# Altium PCB box35x30.PcbDoc
Units mm, origin at the board's own origin, x right, y up, seen from the top; angles counter-clockwise.
Board outline 34.08 x 19.9 mm, 2 copper layers (Top Layer, Bottom Layer); 26 components, 22 nets, 105 pads, 7 vias.
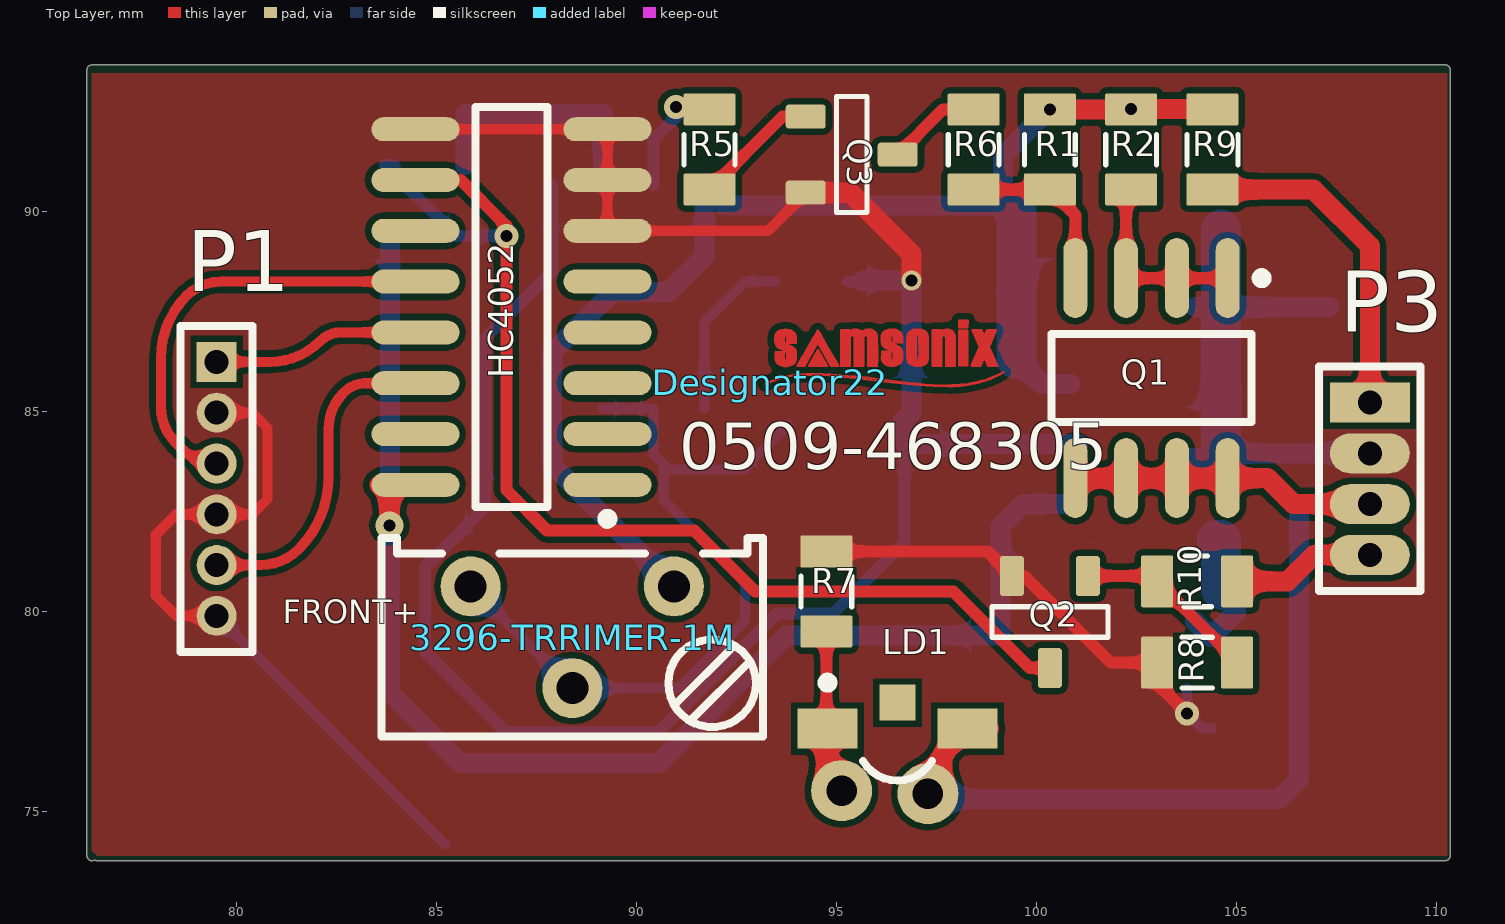
[diagram p0: Top Layer view]
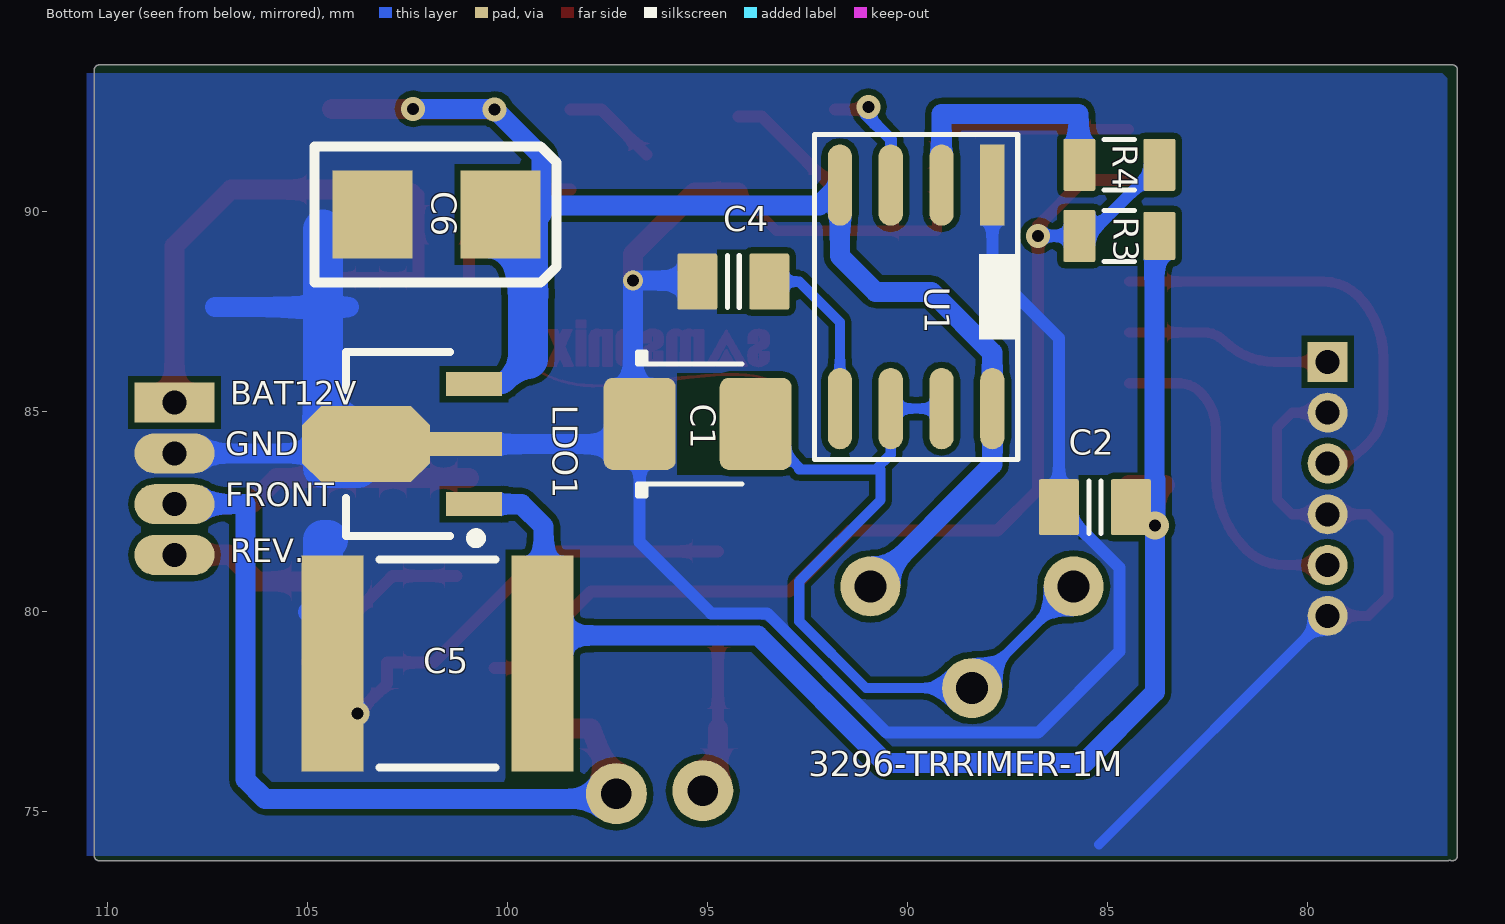
[diagram p1: Bottom Layer view, seen from below]
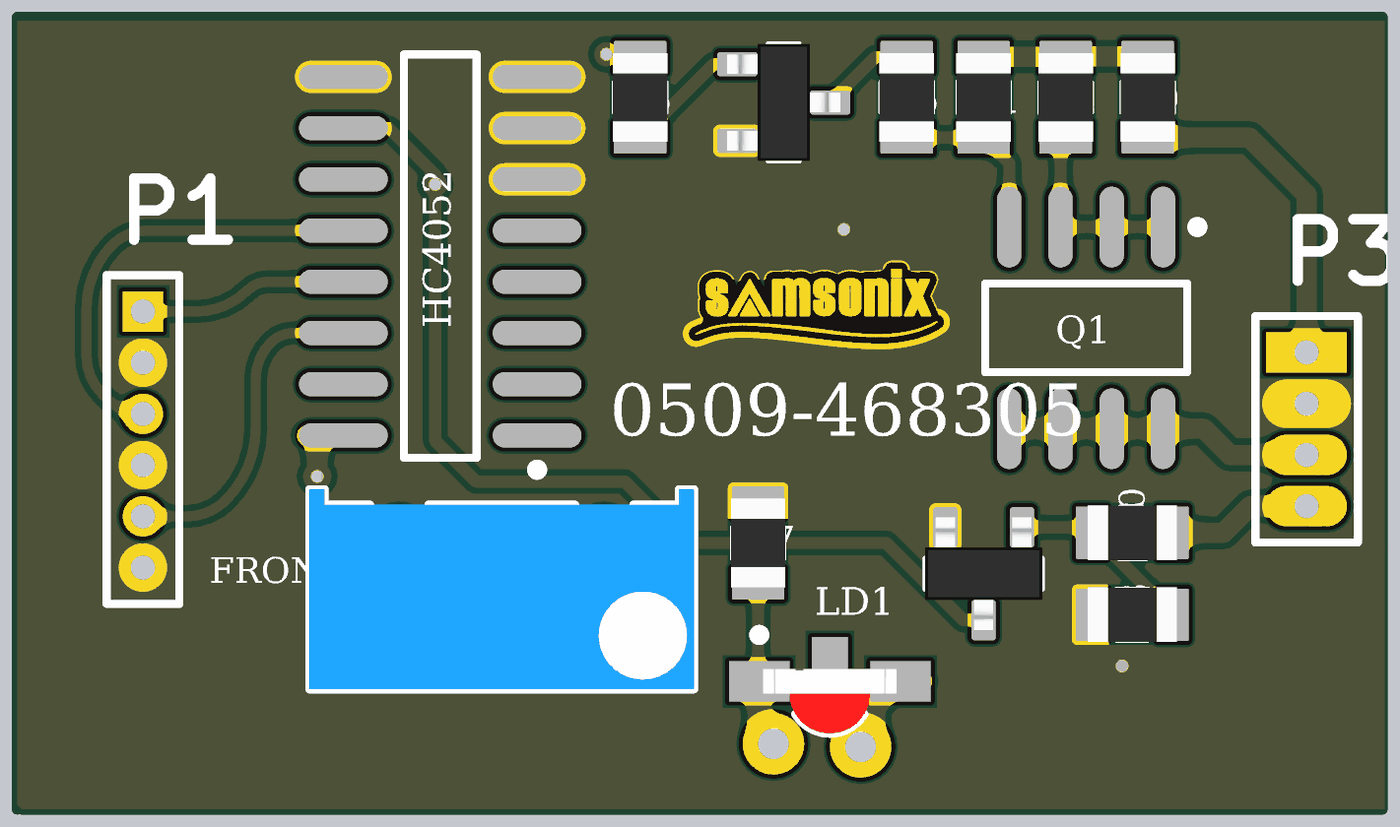
[diagram p2: 3D render of the assembled board from above, using the file's embedded part models]
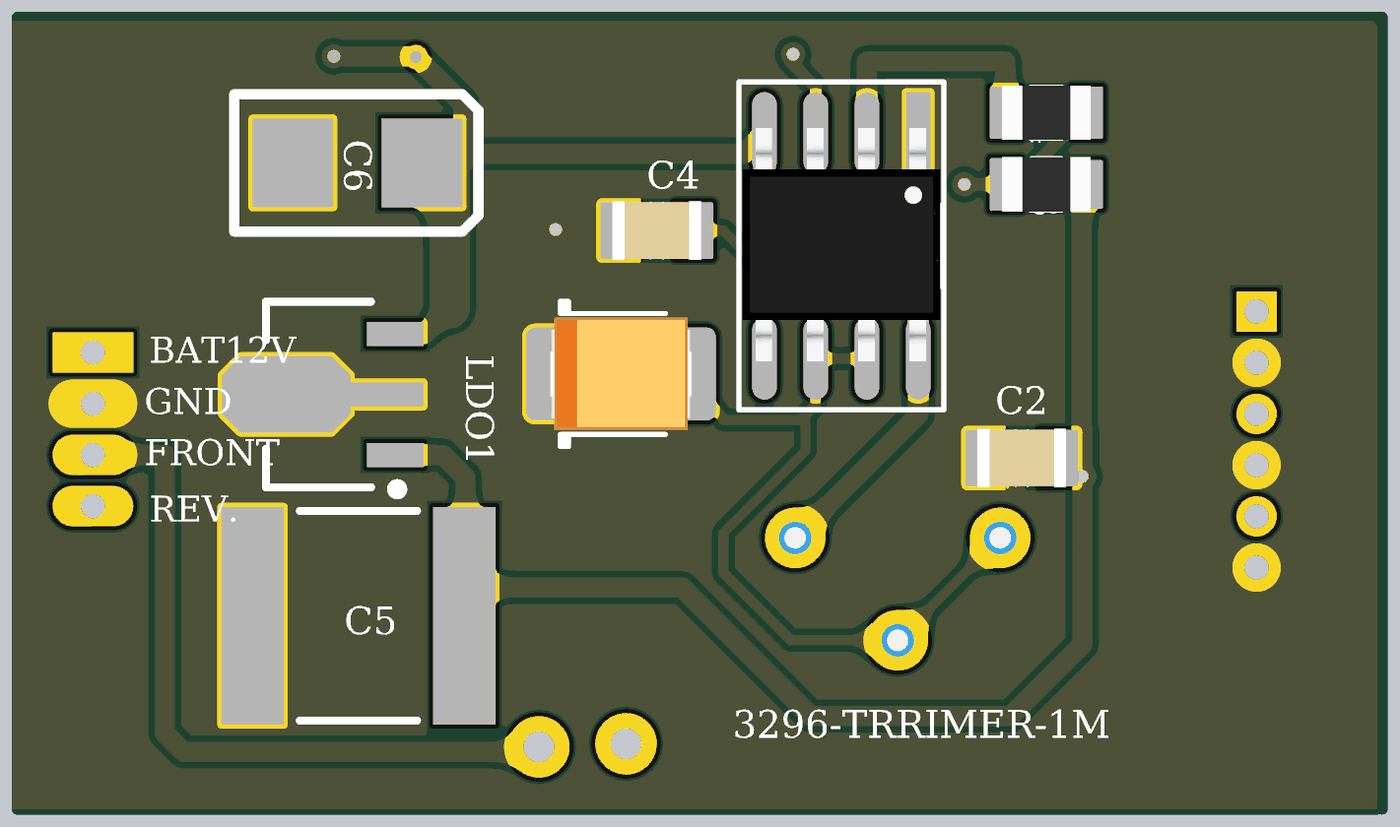
[diagram p3: 3D render of the assembled board from below, using the file's embedded part models]

## Layer stack, top to bottom
Top Solder: solder mask 0.0102, Solder Resist, Dk 3.5
Top Layer: signal copper 0.0356
Dielectric 1: dielectric 0.32, FR-4, Dk 4.8
Bottom Layer: signal copper 0.0356
Bottom Solder: solder mask 0.0102, Solder Resist, Dk 3.5

## Board outline
76.256,73.889 76.256,93.531 cw(c76.383,93.531) 76.383,93.658 110.211,93.658 cw(c110.211,93.531) 110.338,93.531 110.338,73.889 cw(c110.211,73.889) 110.211,73.761 76.51,73.761 cw(c76.51,73.889) 76.446,73.778 cw(c76.383,73.889)

## Design rules (kind name [scope] priority, off if disabled: settings)
Clearance [All] p1: gap=0.152
HoleSize [All] p1: absolutevalues=TRUE maxlimit=6.3 minlimit=0.125 maxpercent=80.000 minpercent=20.000
MinimumAnnularRing [All] p1: minimumring=0.1
PolygonConnect [All] p1: connectstyle=Direct reliefconductorwidth=0.254 reliefentries=4 polygonreliefangle="90 Angle" airgapwidth=0.254
RoutingVias [All] p1: holewidth=0.5 width=0.5 viastyle="Through Hole" minholewidth=0.3 minwidth=0.5 maxholewidth=0.4 maxwidth=1
SMDNeckDown [All] p1: percent=95.000
SilkToSilkClearance [All] p1 off: silktosilkclearance=0.01
SilkToSolderMaskClearance [IsPad] p1: minsilkscreentomaskgap=0.178 clearancetoexposedcopper=TRUE
SolderMaskExpansion [All] p1: expansion=0.1
Width Width_Logo [InUnion(1)] p1: maxlimit=1 minlimit=0.001 preferedwidth=0.254
Width Width_Power [InNetClass('Power')] p2: maxlimit=2 minlimit=0.3 preferedwidth=0.5
Width [All] p3: maxlimit=2 minlimit=0.254 preferedwidth=0.254
27 further rules are at their usual default settings.

## Components (designator, comment, footprint, x,y, rotation, side; value= is the part's Value field where it differs from the comment)
3296-TRRIMER-1M "1M" TRIM_BOURNS_3296Y 88.392,79.35 r180 top
C1 "Cap_Tan_1210" CAP_TAN_B1210 95.25,84.684 r180 bottom
C2 "Cap_0805" CAP_0805 85.319,82.601 r180 bottom
C4 "Cap_0805" CAP_0805 94.361,88.24 r180 bottom
C5 "CAP 47uF 25V 2220(5750)" CAPC2220(5750)230_N 101.752,78.689 r180 bottom
C6 "TAJB106K020R" AVX-CAPC3528_V 101.778,89.916 r0 bottom
Designator22 "Comment" "SAMSONIX 6x2_TL" 93.345,85.725 r0 top
HC4052 "MC74HC4052AD" 751B-05_N 86.868,87.605 r180 top
LD1 "Red" LED_AVAGO_HSMC-C110 96.52,77.064 r0 top
LDO1 "L78L05ABUTR" SOT-89_N 102.743,84.176 r0 bottom
P1 "VIDEO" MHDR1X6 79.502,86.233 r270 top
P3 "MHDR1X4" MHDR1X4 108.331,85.217 r270 top
Q1 "SI4435DY" SO-8_N 102.87,85.827 r270 top
Q2 "MBT2222" SOT23-3 100.33,79.731 r270 top
Q3 "MBT2222" SOT23-3 95.377,91.415 r0 top
R1 "Res_0805" RES_0805#1 100.33,91.542 r90 top
R2 "Res_0805" RES_0805#1 102.362,91.542 r90 top
R3 "Res_0805" RES_0805#2 84.709,89.383 r0 bottom
R4 "Res_0805" RES_0805#1 84.709,91.161 r0 bottom
R5 "Res_0805" RES_0805#1 91.821,91.542 r90 top
R6 "Res_0805" RES_0805#1 98.425,91.542 r270 top
R7 "Res_0805" RES_0805#1 94.742,80.493 r270 top
R8 "Res_0805" RES_0805#1 104.013,78.715 r180 top
R9 "Res_0805" RES_0805#1 104.394,91.542 r270 top
R10 "Res_0805" RES_0805#1 104.013,80.747 r180 top
U1 "NE555" SO8 87.884,90.653 r270 bottom

## Footprints (in the part's own frame and the unit in brackets; to place one, negate y for a bottom-side part, rotate by r counter-clockwise, add the part's x,y. Pads: shape width x height; smd on the part's side, far side on the other; paste and mask are expansions set on the pad)
751B-05_N [mm] "SOIC, 16-Leads, Body 9.9x3.9mm, Pitch 1.27mm, IPC Medium Density"
  oval 2.2x0.6 smd: 1(-2.4,4.445) 2(-2.4,3.175) 3(-2.4,1.905) 4(-2.4,0.635) 5(-2.4,-0.635) 6(-2.4,-1.905) 7(-2.4,-3.175) 8(-2.4,-4.445) 9(2.4,-4.445) 10(2.4,-3.175) 11(2.4,-1.905) 12(2.4,-0.635) 13(2.4,0.635) 14(2.4,1.905) 15(2.4,3.175) 16(2.4,4.445)
  silkscreen extent -2.53,-5 0.9,5.42, body extent -2,-5 2,5, height 1.75
AVX-CAPC3528_V [mm] "SMT Capacitor, 2 Leads, Body 3.5x2.8mm"
  rect 2x2.2 smd: 1(-1.6,0) 2(1.6,0)
  silkscreen extent -3,-1.7 3.05,1.7, body extent -1.79,-1.54 1.8,1.54, height 1.9
CAP_0805 [mm] "Chip Capacitor, Body 2.0x1.2mm, 0805, IPC Medium Density"
  round 0.254 on Mech14: 0(0,0)
  rrect10% 1x1.4 smd: 1(-0.9,0) 2(0.9,0)
  Top Layer pour cut-out: -0.4,0.8 0.4,0.8 0.4,-0.8 -0.4,-0.8
  silkscreen extent -0.15,-0.65 0.15,0.65, body extent -1.1,-0.72 1.1,0.73, height 1.34
CAP_TAN_B1210 [mm] "Molded body capacitor, Body 3.5x2.8mm, 1210, IPC Nominal settings"
  round 0.254 on Mech14: 0(0,0)
  rrect25% 1.8x2.3 smd: 1(-1.45,0) 2(1.45,0)
  Top Layer pour cut-out: -0.508,1.27 0.508,1.27 0.508,-1.27 -0.508,-1.27
  silkscreen extent -1.5,-1.8 1.1,1.8, body extent -1.75,-1.4 1.75,1.4, height 2.1
CAPC2220(5750)230_N [mm] "Chip Capacitor, Body 5.7x5.0mm, Height 2.3mm, IPC Medium Density"
  rect 1.55x5.4 smd: 1(-2.625,0) 2(2.625,0)
  silkscreen extent -1.45,-2.6 1.45,2.6, body extent -3.05,-2.7 3.05,2.7, height 2.3
LED_AVAGO_HSMC-C110 [mm] "Red Chip LED, 2-Leads, Body 3.3x1.6mm, Side Emitting Package"
  rect 1.5x1 smd: 1(-1.75,0) 2(1.75,0)
  rect 0.9x0.9 smd: 3(0,0.65)
  silkscreen extent -1.87,-1.3 0.86,1.27, body extent -1.65,-1.3 1.65,0.3, height 1
MHDR1X4 [mm] "Connector; Header; 4 Position"
  rect 1x2 hole 0.6: 1(0,0)
  oval 1x2 hole 0.6: 2(1.27,0) 3(2.54,0) 4(3.81,0)
  silkscreen extent -0.9,-1.27 4.71,1.27
MHDR1X6 [mm] "Connector; Header; 6 Position"
  rect 1x1 hole 0.6: 1(0,0)
  round 1 hole 0.6: 2(1.27,0) 3(2.54,0) 4(3.81,0) 5(5.08,0) 6(6.35,0)
  silkscreen extent -0.9,-0.9 7.25,0.9
RES_0805#1 [mm] "Chip Resistor, Body 2.0x1.2mm, 0805, IPC Medium Density"
  round 0.254 on Mech14: 0(0,0)
  rrect10% 0.8x1.3 smd: 1(-1,0) 2(1,0)
  Top Layer pour cut-out: -0.6,0.75 0.6,0.75 0.6,-0.75 -0.6,-0.75
  silkscreen extent -0.38,-0.64 0.38,0.64, body extent -1.1,-0.67 1.1,0.68, height 0.69
RES_0805#2 [mm] "Chip Resistor, Body 2.0x1.2mm, 0805, IPC Medium Density"
  round 0.254 on Mech14: 0(0,0)
  rrect10% 0.8x1.2 smd: 1(-1,0)
  rrect10% 0.8x1.3 smd: 2(1,0)
  Top Layer pour cut-out: -0.6,0.75 0.6,0.75 0.6,-0.75 -0.6,-0.75
  silkscreen extent -0.38,-0.64 0.38,0.64, body extent -1.1,-0.67 1.1,0.68, height 0.69
"SAMSONIX 6x2_TL" [mm]
  Top Layer drawing of 841 lines, arcs and shapes, not listed
SO8 [mil]
  rect 80x24 smd: 1(0,0)
  oval 80x24 smd: 2(0,-50) 3(0,-100) 4(0,-150) 5(220,-150) 6(220,-100) 7(220,-50) 8(220,0)
  silkscreen extent -50,-175 270,25, body extent -5,-172 222,22, height 57
SO-8_N [mm] "SOIC, 8-Leads, Body 4.9x3.9mm, Pitch 1.27mm, IPC Medium Density"
  oval 2x0.6 smd: 1(-2.5,1.905) 2(-2.5,0.635) 3(-2.5,-0.635) 4(-2.5,-1.905) 5(2.5,-1.905) 6(2.5,-0.635) 7(2.5,0.635) 8(2.5,1.905)
  silkscreen extent -2.62,-2.5 1.1,2.88, body extent -2,-2.5 2,2.5, height 1.75
SOT23-3 [mm] "SOT23, 3 pin"
  round 0.5 on Mech15: 0(0,0)
  rrect25% 1x0.6 smd: 1(-1.15,0.95) 2(-1.15,-0.95) 3(1.15,0)
  silkscreen extent -0.38,-1.45 0.38,1.45, body extent -1.4,-1.45 1.4,1.45, height 1.29
SOT-89_N [mm] "SOT89, 3-Leads, Body 4.5x2.4 mm, Pitch 1.5mm, Lead Span 4.1mm, IPC Medium Density"
  rect 1.4x0.6 smd: 1(-1.9,1.5) 3(-1.9,-1.5)
  rect 1.8x0.6 smd: 2(-1.7,0)
  oct 3.2x1.9 smd: 2(0.8,0)
  silkscreen extent -2.07,-2.3 1.3,2.47, body extent -1.3,-2.3 1.3,2.3, height 1.6
TRIM_BOURNS_3296Y [mm] "Trimming Potentiometer BOURNS 3296Y Series"
  round 1.5 hole 0.8: 1(-2.54,-1.27) 2(0,1.27) 3(2.54,-1.27)
  silkscreen extent -4.76,-2.48 4.76,2.48, body extent -4.76,-2.47 4.77,2.49, height 11.49

## Part data
3296-TRRIMER-1M: library part TRIM_25T_1M_BOURNS_3296Y-1-105LF, "Trimming Potentiometer"
C1 C2 C4: "Capacitor"
C5: library part CMP-1042-00785-1, "CAP 47uF 25V -20% to +80% 2220 (5750 Metric) Thickness 2.2mm SMD"
C6: library part CMP-0279-00001-1, "Capacitor, Tantalum, 10uF 10% 20V MCCT-B (3528)"
HC4052: "Analog Multiplexer/Demultiplexer"
LD1: library part LED_AVAGO_HSMC-C110, "LED Red 1C 2A"
LDO1: "Positive Voltage Regulator, 5V, 4-Pin SOT-89, Tape and Reel"
P1: library part MHDR1X6, "Header, 6-Pin"
P3: "Header, 4-Pin"
Q1: "P-Channel 30V (D-S) Rated  MOSFET"
Q2 Q3: library part NPN_MMBT2222A, "Transistor SMD NPN 40V 600mA 250mW SOT23-3"
R1 R2 R3 R4 R5 R6 R7 R8 R9 R10: "Resistor"
U1: "TIMER IC"

## Free pads (board coordinates)
  round 1.524 hole 0.762: 2(95.123,75.514) 3(97.282,75.438)

## Via types
v1: diameter 0.6, hole 0.3, Top Layer to Bottom Layer, tented both sides, 4 vias
v2: diameter 0.6, hole 0.3, Top Layer to Bottom Layer, 1 vias
v3: diameter 0.7, hole 0.3, Top Layer to Bottom Layer, tented both sides, 1 vias
v4: diameter 0.5, hole 0.3, Top Layer to Bottom Layer, tented both sides, 1 vias

## Nets (pads, with @x,y where several pads share a name; then routed paths per layer and width w, separated by ;. In a path a pad name is that pad's centre, name@x,y a point inside that pad or via, vN(x,y) a via of type N, cw(c..) or ccw(c..) an arc to the next point about the centre after c; other vN are vias at no path point)
12V: 3296-TRRIMER-1M.1 C6.1 LDO1.3 R1.2 R2.2 R9.1 U1.4 U1.8 | length 35.7
  Top Layer w0.5: v2(100.33,92.542) R2.2 ; v1(102.362,92.558) R9.1@104.394,92.558
  Bottom Layer w0.5: 3296-TRRIMER-1M.1 87.884,83.668 U1.8 87.884,86.462 89.408,87.986 90.805,87.986 91.694,88.875 U1.4 92.202,90.145 98.984,90.145 ; 99.153,89.916 99.153,91.38 100.33,92.558 v1(102.362,92.558) ; 99.49,86.311 100.125,85.676 LDO1.3
  Bottom Layer w1: 99.49,86.311 C6.1@99.49,89.949
BAT12V: P3.1 R9.2 | length 8.4
  Top Layer w0.5: R9.2 106.918,90.542 108.331,89.129 P3.1
CAMERA+12V: LD1.2 P3.3 pad.3 Q1.5 Q1.6 Q1.7 Q1.8 | length 28.5
  Top Layer w0.5: pad.3 97.917,77.064 LD1.2 LD1.2@98.806,77.064 ; Q1.5 Q1.6 Q1.7 Q1.8 105.776,83.327 106.426,82.677 P3.3
  Bottom Layer w0.5: pad.3 97.409,75.311 106.073,75.311 106.553,75.791 106.553,82.677 P3.3
FROM_REVERSE: P3.4 R10.1 | length 3.6
  Top Layer w0.5: R10.1 106.274,80.747 106.934,81.407 P3.4
FRONT_AV: HC4052.14 P1.5 | length 8.2
  Top Layer w0.254: P1.5 80.589,81.153 ccw(c80.589,82.515) 81.552,81.552 ccw(c79.756,83.348) 82.296,83.348 82.296,84.551 cw(c83.597,84.551) 82.329,84.844 cw(c83.597,84.551) 82.677,85.471 cw(c83.229,84.919) 83.184,85.698 cw(c83.229,84.919) 83.229,85.7 HC4052.14
FRONT_SW: HC4052.10 Q2.3 R3.2 R4.1 | length 28.8
  Top Layer w0.3: HC4052.10 85.598,90.78 86.741,89.637 v1(86.741,89.383) 86.741,83.033 87.757,82.017 91.44,82.017 92.964,80.493 97.917,80.493 99.829,78.581 Q2.3
  Bottom Layer w0.3: R4.1@83.931,91.161 R4.1 85.487,89.383 R3.2 v1(86.741,89.383)
GND: C1.1 C2.1 C4.1 C5.1 C6.2 HC4052.6 HC4052.7 HC4052.8 HC4052.9 LDO1.2 P1.2 P1.4 P1.6 P3.2 Q2.2 Q3.2 R7.1 R8.2 U1.1 | length 103.8
  Top Layer w0.254: P1.6 78.486,79.883 77.978,80.391 77.978,81.915 78.486,82.423 P1.4 80.391,82.423 80.772,82.804 80.772,84.582 80.391,84.963 P1.2 ; HC4052.9 HC4052.8 HC4052.7 HC4052.6 93.286,89.51 Q3.2@94.241,90.465
  Top Layer w0.3: R7.1 98.768,81.493 Q2.2 99.688,80.881 101.854,78.715 R8.2 103.013,78.191 v1(103.759,77.445)
  Top Layer w0.5: Q3.2@94.241,90.465 95.336,90.465 96.867,88.934 v4(96.867,88.265)
  Bottom Layer w0.254: P1.6 85.217,74.168 ; C4.1 95.656,88.24 C4.1@95.737,88.24 ; C5.1@103.759,78.071 v1(103.759,77.445) 104.131,77.072 C5.1@104.377,77.072
  Bottom Layer w0.3: U1.1 87.884,88.494 86.219,86.828 C2.1 84.709,81.091 84.709,78.994 86.741,76.962 90.532,76.962 93.515,79.945 94.913,79.945 96.7,81.732 C1.1@96.7,84.275
  Bottom Layer w0.5: C4.1@95.656,88.24 95.682,88.265 v4(96.867,88.265) 96.867,84.957 96.647,84.737 C1.1 96.7,84.275 96.799,84.176 LDO1.2@101.043,84.176 ; C5.1@103.962,79.739 104.352,79.35 C5.1@104.987,79.985 ; 103.962,87.605 107.315,87.605 ; LDO1.2@104.74,83.947 P3.2
  Bottom Layer w1: LDO1.2@103.745,83.579 104.613,83.579 104.613,89.545 ; 104.493,81.775 104.613,81.775 C5.1@104.613,80.543
Net3296-TRRIMER-1M_2: 3296-TRRIMER-1M.2 3296-TRRIMER-1M.3 C1.2 U1.6 U1.7 | length 19.7
  Bottom Layer w0.254: 3296-TRRIMER-1M.3 3296-TRRIMER-1M.2 91.042,78.08 92.71,79.747 92.71,80.747 90.678,82.779 90.678,83.541 ; U1.7 U1.6 90.424,83.922 90.805,83.541 92.71,83.541 92.71,83.594 C1.2
NetC4_2: C4.2 U1.5 | length 4.3
  Bottom Layer w0.254: U1.5 91.694,87.224 92.71,88.24 C4.2
NetLD1_1: LD1.1 pad.2 R7.2 | length 4.3
  Top Layer w0.3: LD1.1@94.742,77.092 R7.2
  Top Layer w0.5: LD1.1@94.742,77.064 94.742,75.514 pad.2
NetQ1_1: Q1.1 Q1.2 Q1.3 R2.1 | length 4.8
  Top Layer w0.3: R2.1 102.235,90.415 Q1.3 Q1.2 Q1.1
NetQ1_4: Q1.4 R1.1 R6.2 | length 4.4
  Top Layer w0.3: R6.2 R1.1 100.965,89.907 Q1.4
NetQ2_1: Q2.1 R8.1 R10.2 | length 4.6
  Top Layer w0.3: Q2.1 102.879,80.881 R10.2 105.013,78.747 R8.1
NetQ3_1: Q3.1 R5.1 | length 3.2
  Top Layer w0.3: R5.1 93.644,92.365 Q3.1
NetQ3_3: Q3.3 R6.1 | length 2.4
  Top Layer w0.3: Q3.3 97.654,92.542 R6.1
NetR4_2: R4.2 U1.2 | length 6.5
  Bottom Layer w0.5: R4.2 85.725,91.177 85.725,92.431 89.154,92.431 U1.2
NetR5_2: R5.2 U1.3 | length 3.2
  Top Layer w0.3: v1(90.984,92.61) 91.059,92.685 91.202,92.542 R5.2
  Bottom Layer w0.3: U1.3 90.424,91.796 91.059,92.431 90.984,92.506 v1(90.984,92.61)
REAR_AV: HC4052.12 P1.3 | length 11
  Top Layer w0.254: 78.74,87.884 cw(c79.6,87.023) 79.6,88.24 HC4052.12 ; 78.769,87.913 ccw(c80.371,86.31) 78.105,86.31 78.105,85.121 ccw(c79.406,85.121) 78.486,84.201 78.635,84.052 ccw(c79.502,84.919) P1.3
V2_Y0: HC4052.1
V2_Y1: HC4052.5
VCC: C2.2 C5.2 HC4052.16 LDO1.1 R3.1 | length 35.5
  Top Layer w0.5: v3(83.82,82.144) 83.82,82.906 83.566,83.16 HC4052.16
  Bottom Layer w0.5: 83.809,83.287 83.809,82.155 v3(83.82,82.144) 83.82,77.978 85.598,76.2 90.551,76.2 93.744,79.393 99.102,79.393 99.102,82.118 99.659,82.676 LDO1.1 ; 83.836,83.287 R3.1@83.836,89.383
VIDEO_OUT1: HC4052.13 P1.1 | length 5.2
  Top Layer w0.254: P1.1 80.823,86.233 ccw(c80.823,88.031) 81.57,86.396 ccw(c80.823,88.031) 82.095,86.76 cw(c82.602,86.253) 82.602,86.97 HC4052.13
pads on no net: C1.0 C2.0 C4.0 HC4052.2 HC4052.3 HC4052.4 HC4052.11 HC4052.15 LD1.3 Q2.0 Q3.0 R1.0 R2.0 R3.0 R4.0 R5.0 R6.0 R7.0 R8.0 R9.0 R10.0

## Polygon pours and split planes (outlines as drawn)
GND on Top Layer "POLY-TOP_GND" (solid, pour order 4): 76.383,93.447 110.267,93.447 110.267,73.889 76.51,73.889 76.383,74.016 76.383,93.32
GND on Bottom Layer "POLY-TOP_GND" (solid, pour order 6): 110.521,93.447 76.637,93.447 76.51,93.32 76.51,73.889 110.521,73.889

## Silkscreen, mask and mechanical layers (free items; w line width, h text height)
Top Overlay:
  text "0509-468305" at 91.059,83.16 h2
  text "FRONT+" at 81.153,79.502 h1
Bottom Overlay:
  text "BAT12V" at 106.934,84.963 h1
  text "GND" at 107.061,83.693 h1
  text "FRONT" at 107.061,82.423 h1
  text "REV." at 106.934,81.026 h1
Mechanical 7:
  lines w0.254: 76.383,73.889 76.383,93.531 110.211,93.531 110.211,73.889 76.51,73.889

## Text inside footprints (layer, text, board x,y; h text height)
LD1: Mechanical 8 "K" at 95.037,76.814 h0.5